# Altium PCB roTDSP.PcbDoc (part 1 of 2)
Units mm, origin at the board's own origin, x right, y up, seen from the top; angles counter-clockwise.
Board outline 100.2 x 100 mm, 2 copper layers (Top Layer, Bottom Layer); 148 components, 98 nets, 431 pads, 651 vias.
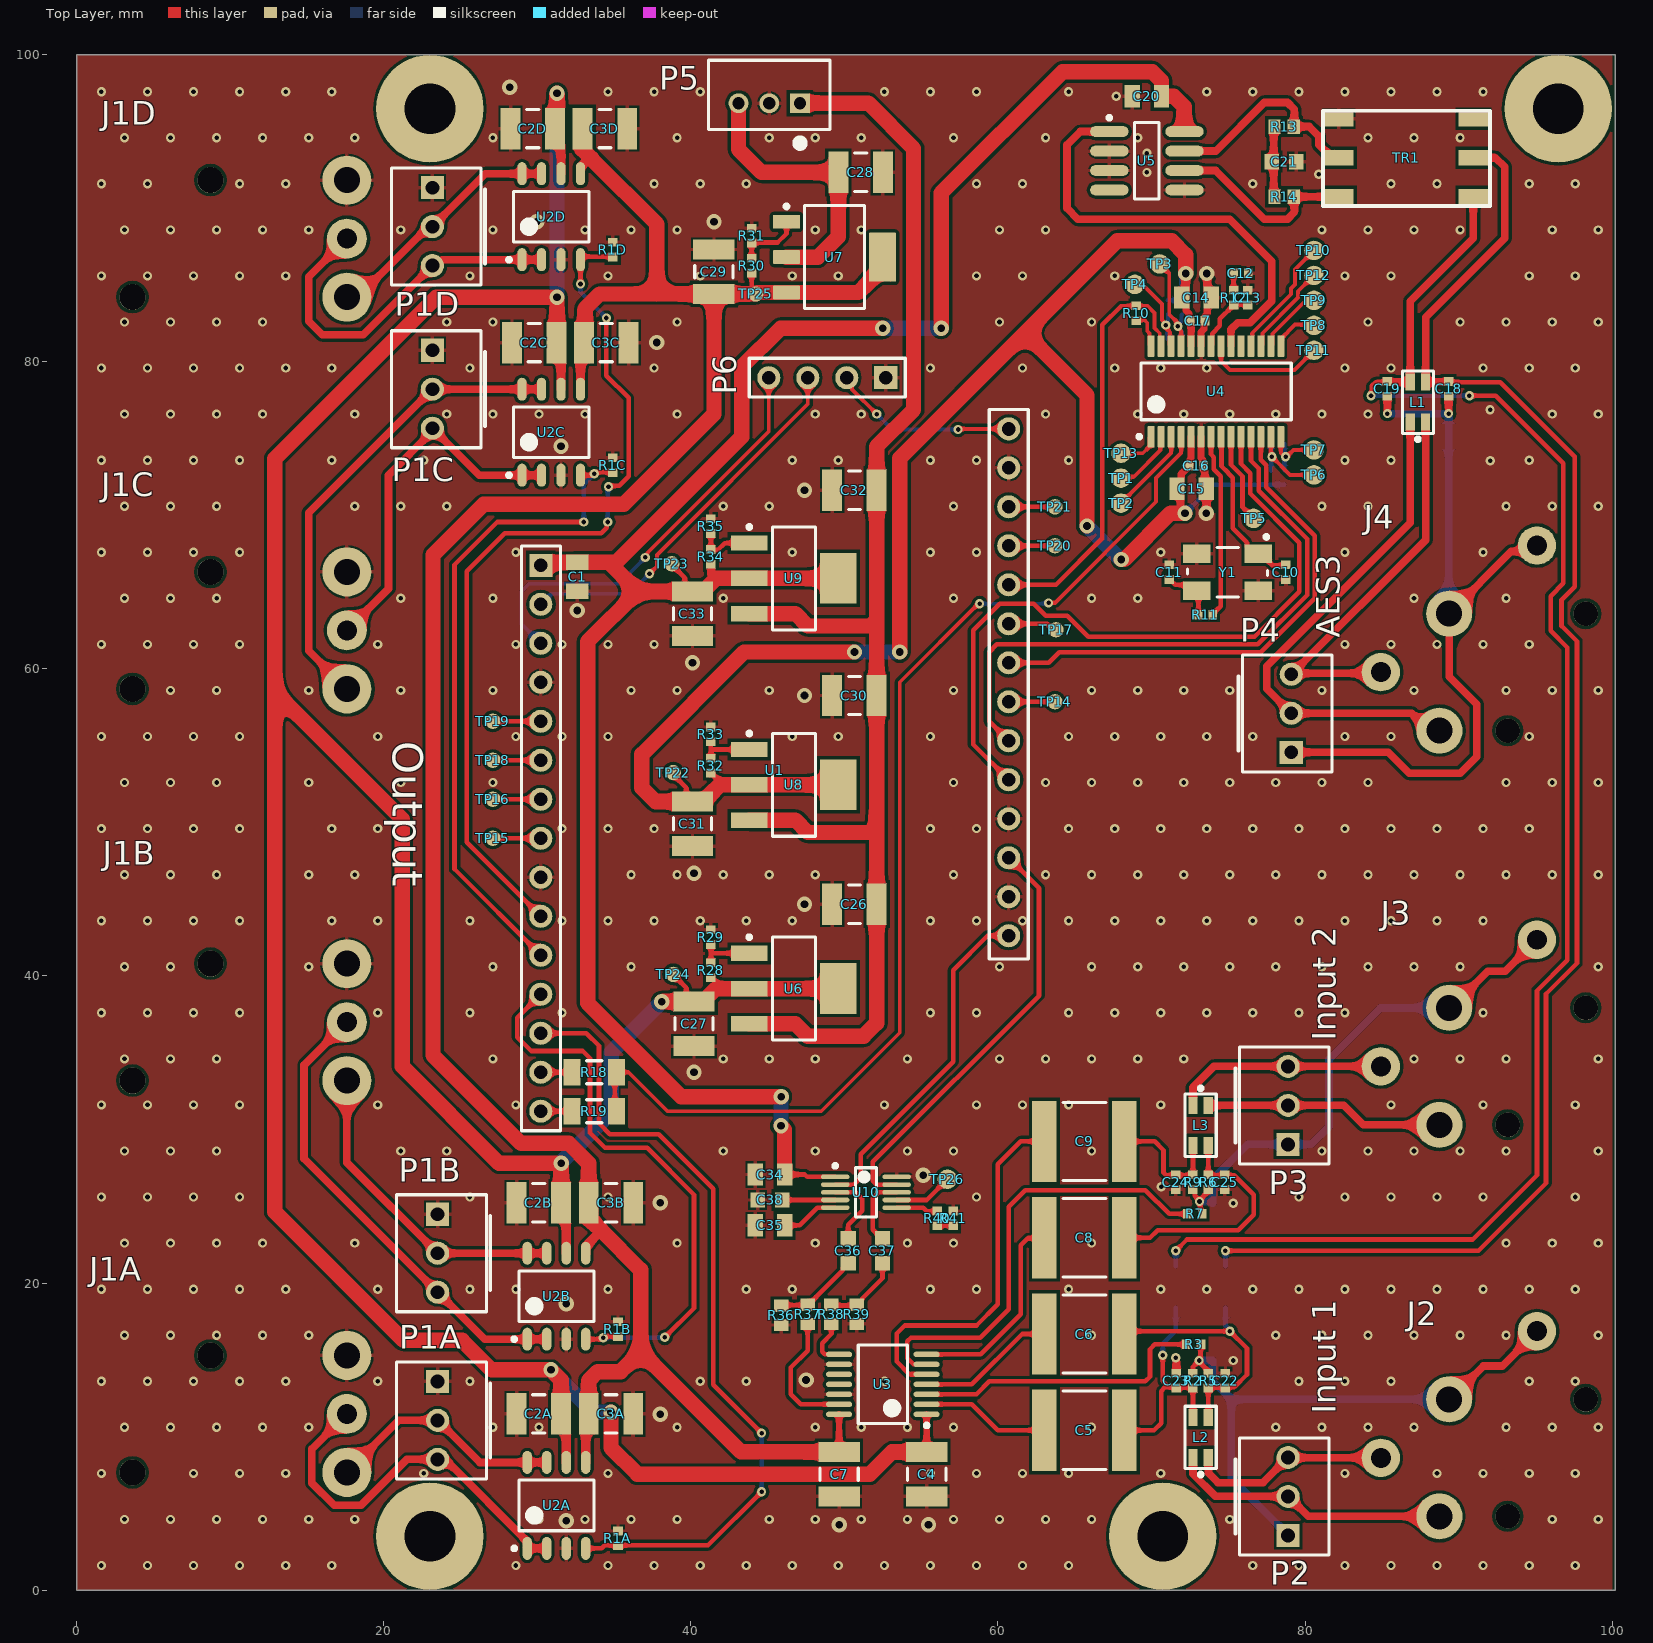
[diagram p0: Top Layer view]
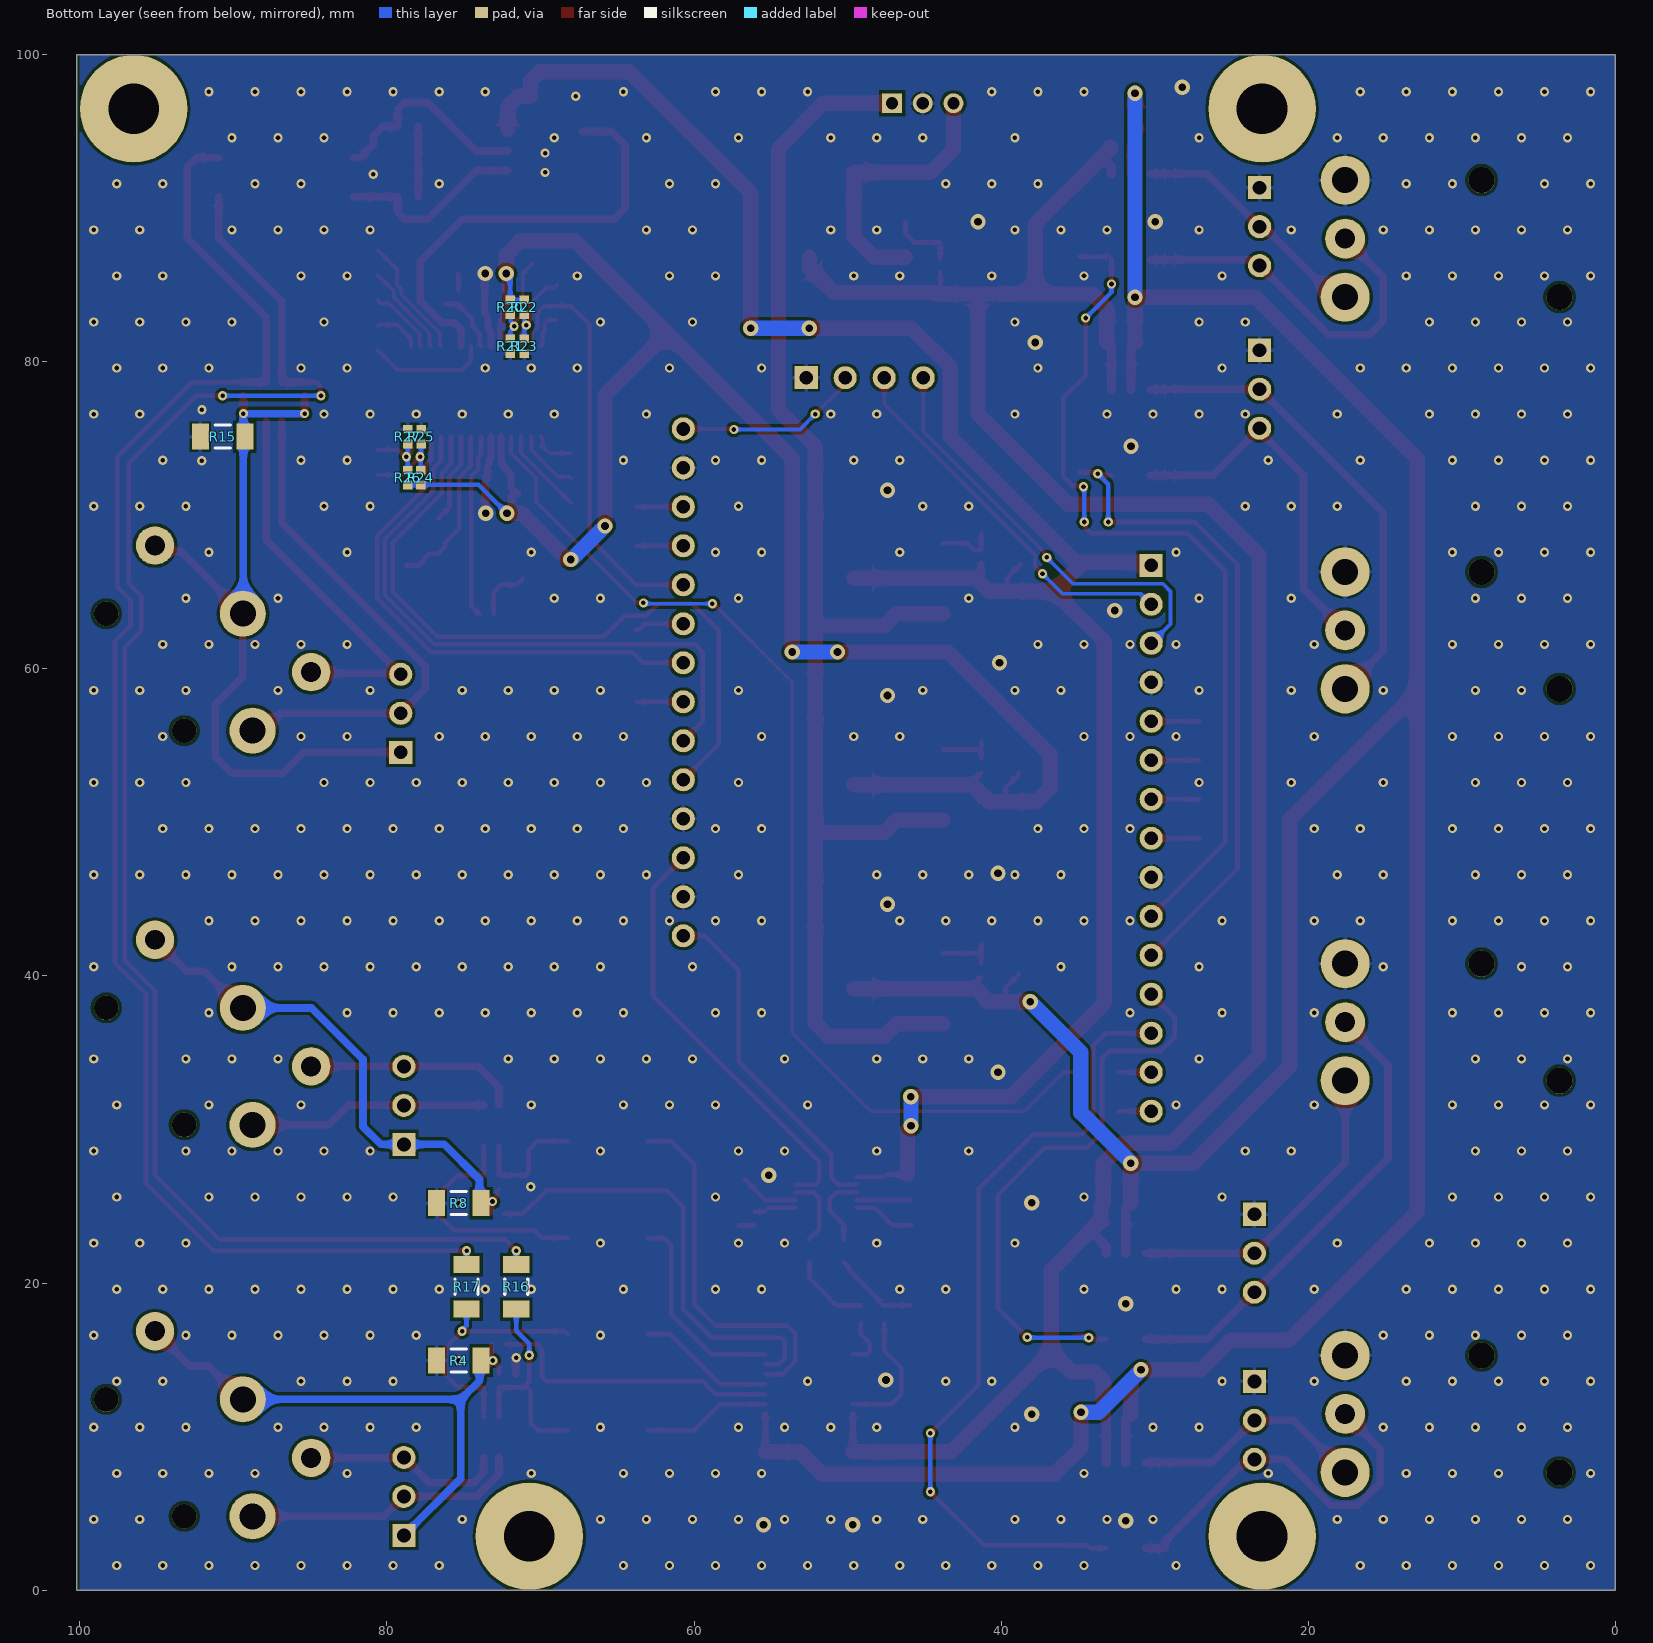
[diagram p1: Bottom Layer view, seen from below]
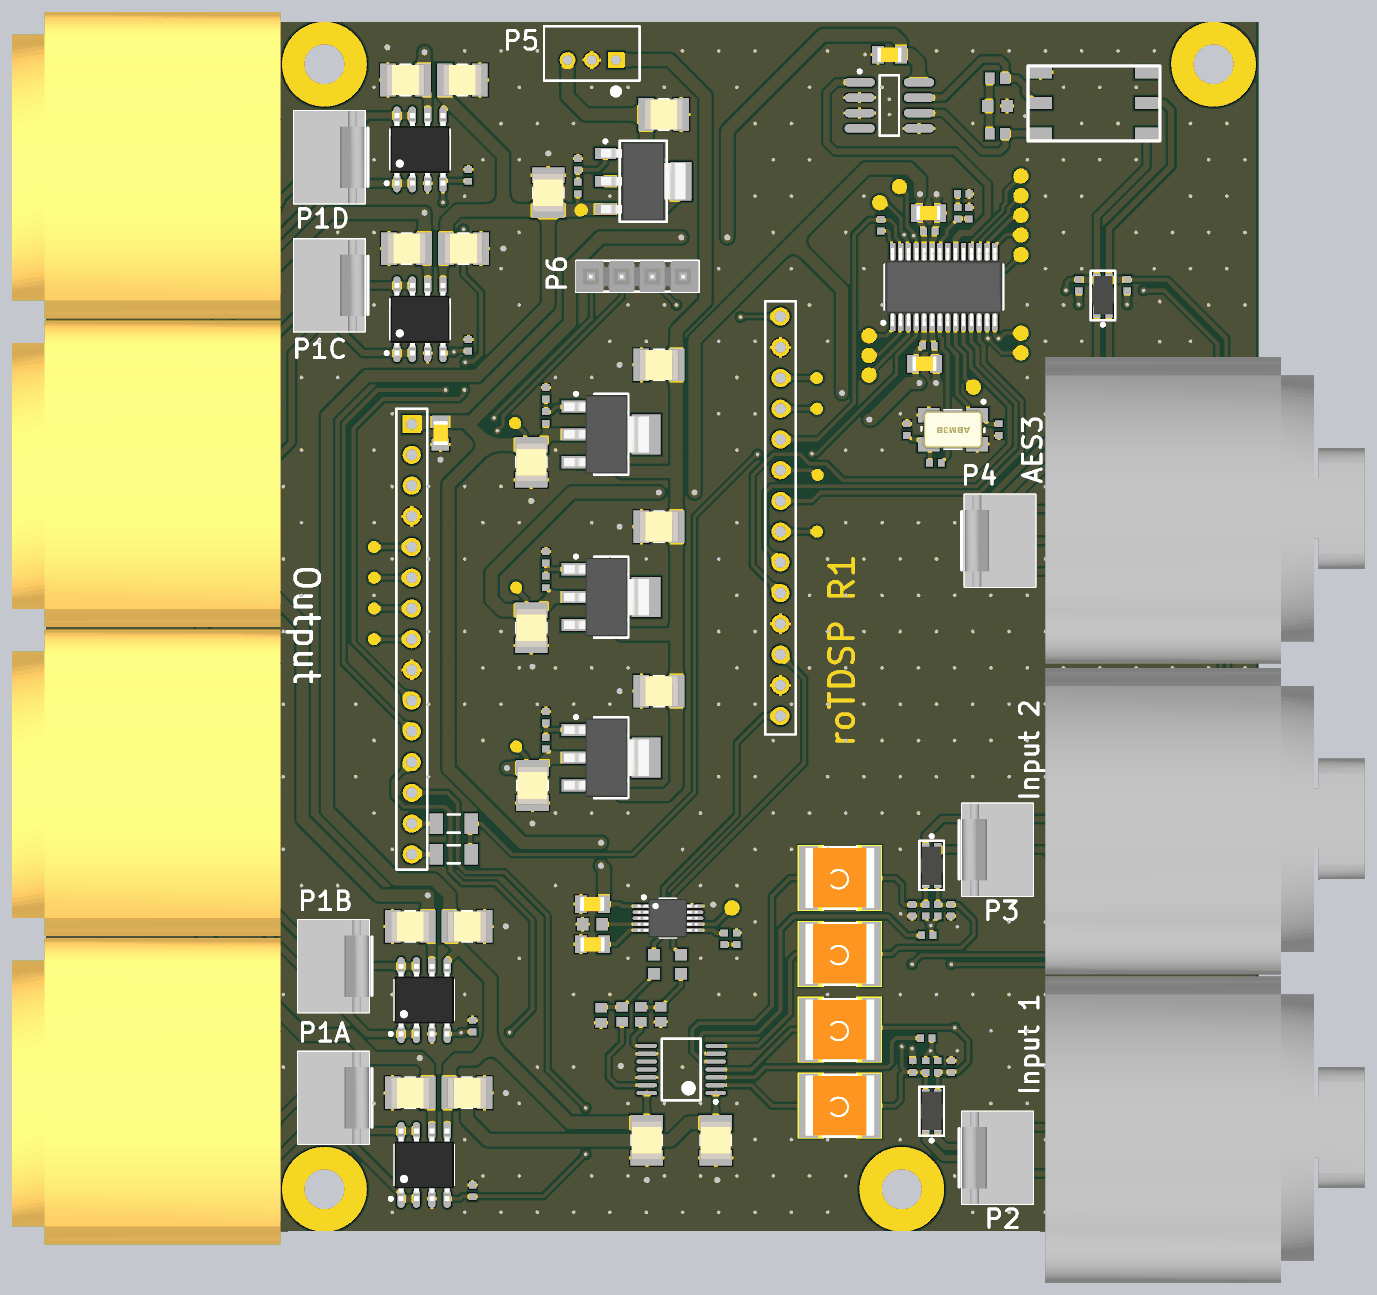
[diagram p3: 3D render of the assembled board from above, using the file's embedded part models]

## Layer stack, top to bottom
Top Solder: solder mask 0.0102, Solder Resist, Dk 3.5
Top Layer: signal copper 0.0356
Dielectric 1: dielectric 0.32, FR-4, Dk 4.8
Bottom Layer: signal copper 0.0356
Bottom Solder: solder mask 0.0102, Solder Resist, Dk 3.5

## Board outline
0,0 100.2,0 100.2,100 0,100

## Design rules (kind name [scope] priority, off if disabled: settings)
Clearance [All] p1: gap=0.2 ignorepadtopadclearanceinfootprint=FALSE
ComponentClearance ComponentClearance_nocollision [InComponentClass('NoColission')] p1: gap=-100 collisioncheckmode=3 verticalgap=2540 showdistances=FALSE
ComponentClearance [All] p2: gap=0.254 collisioncheckmode=3 verticalgap=0.254 showdistances=FALSE
Height [All] p1: minheight=0 maxheight=254 prefheight=12.7
HoleSize [All] p1: absolutevalues=TRUE maxlimit=5 minlimit=0.025 maxpercent=80.000 minpercent=20.000
MinimumSolderMaskSliver [All] p1: minsoldermaskwidth=0
PlaneClearance [All] p1: clearance=0.2
PlaneConnect [All] p1: planeconnectstyle=Direct reliefexpansion=0.127 reliefentries=4 reliefconductorwidth=0.254 reliefairgap=0.127
PolygonConnect NetTieDirect [InComponentClass('NetTieDirect') or InNetClass('NetTieDirect')] p1: connectstyle=Direct reliefconductorwidth=0.254 reliefentries=4 polygonreliefangle="90 Angle" airgapwidth=0.254 // polygon shall connect direct to all componnets in Component Class "NetTieRelief".
PolygonConnect NetTieRelief [InComponentClass('NetTieRelief')] p2: connectstyle=Relief reliefconductorwidth=0.254 reliefentries=4 polygonreliefangle="90 Angle" airgapwidth=0.254 // All pads in this component class "NetTieRelief" shall have this distance to the Polygon
PolygonConnect "PolygonConnect_ BGA" [HasFootprint('BGA289C80P17X17_1400X1400X132') or HasFootprint('96_FPGA_DD3_14mmx10mm-small_size')] p3: thpad.connectstyle=Relief thpad.reliefconductorwidth=0.254 thpad.reliefentries=4 thpad.polygonreliefangle="90 Angle" thpad.airgapwidth=0.127 smdpad.connectstyle=Relief smdpad.reliefconductorwidth=0.127 smdpad.reliefentries=4 smdpad.polygonreliefangle="90 Angle" smdpad.airgapwidth=0.1 via.connectstyle=Direct via.reliefconductorwidth=0.254 via.reliefentries=4 via.polygonreliefangle="90 Angle" via.airgapwidth=0.127
PolygonConnect "PolygonConnect_ General" [All] p4: thpad.connectstyle=Relief thpad.reliefconductorwidth=0.254 thpad.reliefentries=4 thpad.polygonreliefangle="90 Angle" thpad.airgapwidth=0.127 smdpad.connectstyle=Relief smdpad.reliefconductorwidth=0.254 smdpad.reliefentries=4 smdpad.polygonreliefangle="90 Angle" smdpad.airgapwidth=0.127 via.connectstyle=Direct via.reliefconductorwidth=0.254 via.reliefentries=4 via.polygonreliefangle="90 Angle" via.airgapwidth=0.127
RoutingVias [All] p1: holewidth=0.5 width=1 viastyle="Through Hole" minholewidth=0.3 minwidth=0.6 maxholewidth=0.5 maxwidth=1
SilkToSilkClearance [All] p1: silktosilkclearance=0.1
SilkToSolderMaskClearance [IsPad] p1: minsilkscreentomaskgap=0 clearancetoexposedcopper=TRUE
SolderMaskExpansion [All] p1: expansion=0.102 istentingtop=FALSE
UnpouredPolygon [All] p1: allowshelved=TRUE
Width [All] p1: maxlimit=1 minlimit=0.254 preferedwidth=0.3 minimp=50.000000 maximp=50.000000 favimp=50.000000
21 further rules are at their usual default settings.

## Classes and differential pairs
channel class OutputDriver: Output1 Output2 Output3 Output4

## Components (designator, comment, footprint, x,y, rotation, side; value= is the part's Value field where it differs from the comment)
C1 "Cap" CAPC2013X140X50NL20T25 32.593,66 r90 top value=10µF
C2A "Cap" CAPC3225N 30.093,11.473 r0 top value=1µF (schematic designator C2)
C2B "Cap" CAPC3225N 30.093,25.23 r0 top value=1µF (schematic designator C2)
C2C "Cap" CAPC3225N 29.794,81.26 r0 top value=1µF (schematic designator C2)
C2D "Cap" CAPC3225N 29.7,95.2 r0 top value=1µF (schematic designator C2)
C3A "Cap" CAPC3225N 34.793,11.473 r180 top value=1µF (schematic designator C3)
C3B "Cap" CAPC3225N 34.793,25.23 r180 top value=1µF (schematic designator C3)
C3C "Cap" CAPC3225N 34.494,81.26 r180 top value=1µF (schematic designator C3)
C3D "Cap" CAPC3225N 34.4,95.2 r180 top value=1µF (schematic designator C3)
C4 "Cap" CAPC3225N 55.35,7.55 r90 top value=1µF
C5 "Cap" CAPC5750N 65.625,10.405 r180 top value=10µF
C6 "Cap" CAPC5750N 65.625,16.678 r180 top value=10µF
C7 "Cap" CAPC3225N 49.65,7.55 r90 top value=1µF
C8 "Cap" CAPC5750N 65.625,22.95 r180 top value=10µF
C9 "Cap" CAPC5750N 65.625,29.222 r180 top value=10µF
C10 "Cap" CAPC1005X56X25NL10T15 78.757,66.3 r90 top value=18pF
C11 "Cap" CAPC1005X56X25NL10T15 71.157,66.3 r270 top value=18pF
C12 "Cap" CAPC1005X56X25NL10T15 75.818,85.781 r180 top value=68nF
C13 "Cap" CAPC1005X56X25NL10T15 76.268,84.19 r270 top value=4.7nF
C14 "Cap" CAPC2013X140X50NL20T25 72.931,84.19 r180 top value=10µF
C15 "Cap" CAPC2013X140X50NL20T25 72.607,71.74 r180 top value=10µF
C16 "Cap" CAPC1005X56X25NL10T15 72.931,73.24 r0 top value=100nF
C17 "Cap" CAPC1005X56X25NL10T15 73.004,82.69 r0 top value=100nF
C18 "Cap" CAPC1005X56X25NL10T15 89.355,78.24 r90 top value=15pF
C19 "Cap" CAPC1005X56X25NL10T15 85.365,78.24 r90 top value=15pF
C20 "Cap" CAPC2013X140X50NL20T25 69.7,97.3 r0 top value=10µF
C21 "Cap" CAPC1608X90X35NL15T15 78.634,93.048 r180 top value=100nF
C22 "Cap" CAPC1005X56X25NL10T15 74.819,13.64 r270 top value=15pF
C23 "Cap" CAPC1005X56X25NL10T15 71.619,13.64 r270 top value=15pF
C24 "Cap" CAPC1005X56X25NL10T15 71.581,26.57 r90 top value=15pF
C25 "Cap" CAPC1005X56X25NL10T15 74.781,26.57 r90 top value=15pF
C26 "Cap" CAPC3225N 50.65,44.68 r0 top value=1µF
C27 "Cap" CAPC3225N 40.2,36.88 r90 top value=1µF
C28 "Cap" CAPC3225N 51.05,92.345 r0 top value=1µF
C29 "Cap" CAPC3225N 41.5,85.875 r270 top value=1µF
C30 "Cap" CAPC3225N 50.65,58.27 r0 top value=1µF
C31 "Cap" CAPC3225N 40.1,49.91 r90 top value=1µF
C32 "Cap" CAPC3225N 50.65,71.645 r0 top value=1µF
C33 "Cap" CAPC3225N 40.1,63.6 r90 top value=1µF
C34 "Cap" CAPC2013X140X50NL20T25 45.15,27.068 r180 top value=10µF
C35 "Cap" CAPC2013X140X50NL20T25 45.15,23.755 r0 top value=10µF
C36 "Cap" CAPC1608X90X35NL15T15 50.242,22.1 r90 top value=470nF
C37 "Cap" CAPC1608X90X35NL15T15 52.475,22.1 r90 top value=470nF
C38 "Cap" CAPC1608X90X35NL15T15 45.15,25.41 r0 top value=470nF
J1A "NC3MAAH-1" NC3MAAH-1 17.588,11.473 r90 top (schematic designator J1)
J1B "NC3MAAH-1" NC3MAAH-1 17.588,36.991 r90 top (schematic designator J1)
J1C "NC3MAAH-1" NC3MAAH-1 17.588,62.509 r90 top (schematic designator J1)
J1D "NC3MAAH-1" NC3MAAH-1 17.588,88.027 r90 top (schematic designator J1)
J2 "Input 1" NC3FAH2 89.39,12.42 r270 top
J3 "Input 2" NC3FAH2 89.39,37.92 r270 top
J4 "AES3" NC3FAH2 89.39,63.6 r270 top
L1 "Common Mode Choke" WE-CNSW-1206 87.355,77.38 r180 top
L2 "Common Mode Choke" WE-CNSW-1206 73.2,9.94 r180 top
L3 "Common Mode Choke" WE-CNSW-1206 73.2,30.27 r0 top
P1A "Header 3" MTA-100-3P 23.5,13.593 r270 top (schematic designator P1)
P1B "Header 3" MTA-100-3P 23.5,24.48 r270 top (schematic designator P1)
P1C "Header 3" MTA-100-3P 23.157,80.76 r270 top (schematic designator P1)
P1D "Header 3" MTA-100-3P 23.157,91.35 r270 top (schematic designator P1)
P2 "Header 3" MTA-100-3P 78.9,3.56 r90 top
P3 "Header 3" MTA-100-3P 78.9,29.03 r90 top
P4 "Header 3" MTA-100-3P 79.104,54.57 r90 top
P5 "B3B-PH-K-S(LF)(SN)" JST-B3B-PH-K-S-3_V 45.1,97.4 r180 top
P6 "Header 4" TSW-104-14-S-S 52.69,78.97 r180 top
R1A "Res" RESC1005X40X25NL05T05 35.248,3.364 r270 top value=100k (schematic designator R1)
R1B "Res" RESC1005X40X25NL05T05 35.248,16.99 r270 top value=100k (schematic designator R1)
R1C "Res" RESC1005X40X25NL05T05 34.905,73.271 r270 top value=100k (schematic designator R1)
R1D "Res" RESC1005X40X25NL05T05 34.905,87.31 r270 top value=100k (schematic designator R1)
R2 "Res" RESC1005X40X25NL05T05 72.7,13.64 r90 top value=100k
R3 "Res" RESC1005X40X25NL05T05 72.748,16 r180 top value=1M
R4 "Res" RESC3216X60X45NL10T20 75.319,14.95 r180 bottom value=0
R5 "Res" RESC1005X40X25NL05T05 73.7,13.64 r270 top value=100k
R6 "Res" RESC1005X40X25NL05T05 73.7,26.57 r270 top value=100k
R7 "Res" RESC1005X40X25NL05T05 72.823,24.5 r180 top value=1M
R8 "Res" RESC3216X60X45NL10T20 75.319,25.201 r180 bottom value=0
R9 "Res" RESC1005X40X25NL05T05 72.7,26.57 r90 top value=100k
R10 "Res" RESC1005X40X25NL05T05 69,83.185 r90 top value=0
R11 "Res" RESC1005X40X25NL05T05 73.507,63.541 r0 top value=510
R12 "Res" RESC1005X40X25NL05T05 75.368,84.19 r270 top value=680
R13 "Res" RESC1609X50X30NL10T20 78.632,95.33 r0 top value=56
R14 "Res" RESC1609X50X30NL10T20 78.632,90.76 r0 top value=56
R15 "Res" RESC3216X60X45NL10T20 90.705,75.13 r180 bottom value=0
R16 "Res" RESC3216X60X45NL10T20 71.581,19.75 r90 bottom value=0
R17 "Res" RESC3216X60X45NL10T20 74.819,19.75 r90 bottom value=0
R18 "Res" RESC3216X60X45NL10T20 33.693,33.73 r0 top value=0
R19 "Res" RESC3216X60X45NL10T20 33.693,31.19 r0 top value=0
R20 "Res" RESC1005X40X25NL05T05 71.974,83.548 r270 bottom value=0
R21 "Res" RESC1005X40X25NL05T05 71.959,81.021 r270 bottom value=0
R22 "Res" RESC1005X40X25NL05T05 71.068,83.565 r270 bottom value=0
R23 "Res" RESC1005X40X25NL05T05 71.054,81.03 r270 bottom value=0
R24 "Res" RESC1005X40X25NL05T05 77.802,72.456 r90 bottom value=0
R25 "Res" RESC1005X40X25NL05T05 77.779,75.13 r90 bottom value=0
R26 "Res" RESC1005X40X25NL05T05 78.654,72.465 r90 bottom value=0
R27 "Res" RESC1005X40X25NL05T05 78.654,75.13 r90 bottom value=0
R28 "Res" RESC1005X40X25NL05T05 41.3,40.379 r270 top value=150
R29 "Res" RESC1005X40X25NL05T05 41.3,42.53 r270 top value=2k
R30 "Res" RESC1005X40X25NL05T05 43.95,86.275 r270 top value=150
R31 "Res" RESC1005X40X25NL05T05 43.95,88.225 r270 top value=2k
R32 "Res" RESC1005X40X25NL05T05 41.3,53.7 r270 top value=240
R33 "Res" RESC1005X40X25NL05T05 41.3,55.74 r90 top value=390
R34 "Res" RESC1005X40X25NL05T05 41.3,67.3 r270 top value=240
R35 "Res" RESC1005X40X25NL05T05 41.3,69.3 r90 top value=750
R36 "Res" RESC1609X50X30NL10T20 45.875,17.89 r270 top value=91
R37 "Res" RESC1609X50X30NL10T20 47.6,17.96 r90 top value=910
R38 "Res" RESC1609X50X30NL10T20 49.15,17.96 r90 top value=910
R39 "Res" RESC1609X50X30NL10T20 50.8,17.96 r90 top value=91
R40 "Res" RESC1005X40X25NL05T05 56.05,24.205 r90 top value=33k
R41 "Res" RESC1005X40X25NL05T05 57.075,24.205 r270 top value=1.8k
TP1 "TP Ø1.27MM" TP_1.27MM 68.014,72.423 r90 top
TP2 "TP Ø1.27MM" TP_1.27MM 68.014,70.798 r90 top
TP3 "TP Ø1.27MM" TP_1.27MM 70.536,86.381 r90 top
TP4 "TP Ø1.27MM" TP_1.27MM 68.91,85.05 r90 top
TP5 "TP Ø1.27MM" TP_1.27MM 76.654,69.81 r90 top
TP6 "TP Ø1.27MM" TP_1.27MM 80.584,72.64 r90 top
TP7 "TP Ø1.27MM" TP_1.27MM 80.584,74.266 r90 top
TP8 "TP Ø1.27MM" TP_1.27MM 80.584,82.381 r90 top
TP9 "TP Ø1.27MM" TP_1.27MM 80.584,84.007 r90 top
TP10 "TP Ø1.27MM" TP_1.27MM 80.584,87.259 r90 top
TP11 "TP Ø1.27MM" TP_1.27MM 80.584,80.755 r90 top
TP12 "TP Ø1.27MM" TP_1.27MM 80.584,85.633 r90 top
TP13 "TP Ø1.27MM" TP_1.27MM 68.014,74.049 r90 top
TP14 "TP Ø1.0MM" TP_1MM 63.714,57.86 r90 top
TP15 "TP Ø1.0MM" TP_1MM 27.1,48.97 r90 top
TP16 "TP Ø1.0MM" TP_1MM 27.1,51.51 r90 top
TP17 "TP Ø1.0MM" TP_1MM 63.78,62.55 r90 top
TP18 "TP Ø1.0MM" TP_1MM 27.1,54.05 r90 top
TP19 "TP Ø1.0MM" TP_1MM 27.1,56.59 r90 top
TP20 "TP Ø1.0MM" TP_1MM 63.714,68.02 r90 top
TP21 "TP Ø1.0MM" TP_1MM 63.714,70.56 r90 top
TP22 "TP Ø1.0MM" TP_1MM 38.85,53.25 r90 top
TP23 "TP Ø1.0MM" TP_1MM 38.75,66.85 r90 top
TP24 "TP Ø1.0MM" TP_1MM 38.85,40.104 r90 top
TP25 "TP Ø1.0MM" TP_1MM 44.225,84.425 r90 top
TP26 "TP Ø1.27MM" TP_1.27MM 56.7,26.76 r90 top
TR1 "TG10-DA1NSLF" TG10-DA1NSLF-Footprint-1 90.96,90.76 r90 top
U1 "ADAU1401-DSPmini" ADAU1401-DSPmini 30.22,66.75 r0 top locked
U2A "DRV135UA" SOIC127P600X360-8N 31.243,5.514 r90 top (schematic designator U2)
U2B "DRV135UA" SOIC127P600X360-8N 31.243,19.14 r90 top (schematic designator U2)
U2C "DRV135UA" SOIC127P600X360-8N 30.9,75.42 r90 top (schematic designator U2)
U2D "DRV135UA" SOIC127P600X360-8N 30.9,89.46 r90 top (schematic designator U2)
U3 "INA1652IPW" SOP65P640X120-14N 52.5,13.4 r180 top
U4 "DIR9001PW" PW0028A_N 74.204,78.08 r90 top
U5 "ADM1485ARZ" ADI-R-8_M 69.7,93.1 r0 top
U6 "LM317EMP" SOT223-4N 46.7,39.18 r0 top
U7 "LM337IMPX" DCY0004A_N 49.35,86.825 r0 top
U8 "LM317EMP" SOT223-4N 46.7,52.45 r0 top
U9 "LM317EMP" SOT223-4N 46.7,65.9 r0 top
U10 "NJM2762RB2" SOP50P490X110-10N 51.4,25.91 r0 top
Y1 "Crystal4" XTAL-5x3.2MM 74.957,66.3 r180 top

## Footprints (in the part's own frame and the unit in brackets; to place one, negate y for a bottom-side part, rotate by r counter-clockwise, add the part's x,y. Pads: shape width x height; smd on the part's side, far side on the other; paste and mask are expansions set on the pad)
ADAU1401-DSPmini [mm]
  rect 1.5x1.5 hole 0.9: 1(0,0)
  round 1.5 hole 0.9: 2(0,-2.54) 3(0,-5.08) 4(0,-7.62) 5(0,-10.16) 6(0,-12.7) 7(0,-15.24) 8(0,-17.78) 9(0,-20.32) 10(0,-22.86) 11(0,-25.4) 12(0,-27.94) 13(0,-30.48) 14(0,-33.02) 15(0,-35.56) 16(30.48,-24.13) 17(30.48,-21.59) 18(30.48,-19.05) 19(30.48,-16.51) 20(30.48,-13.97) 21(30.48,-11.43) 22(30.48,-8.89) 23(30.48,-6.35) 24(30.48,-3.81) 25(30.48,-1.27) 26(30.48,1.27) 27(30.48,3.81) 28(30.48,6.35) 29(30.48,8.89)
  silkscreen extent -1.27,-36.83 31.75,10.16
ADI-R-8_M [mm] "SOIC, 8-Leads, Body 5x4mm, Pitch 1.27mm, IPC Low Density"
  oval 2.5x0.7 smd: 1(-2.45,1.905) 2(-2.45,0.635) 3(-2.45,-0.635) 4(-2.45,-1.905) 5(2.45,-1.905) 6(2.45,-0.635) 7(2.45,0.635) 8(2.45,1.905)
  silkscreen extent -2.57,-2.5 0.8,2.93, body extent -2,-2.5 2,2.5, height 1.75
CAPC1005X56X25NL10T15 [mm] "Chip Capacitor, 2-Leads, Body 1.00x0.50mm, IPC Medium Density"
  rect 0.57x0.62 smd: 1(-0.48,0) 2(0.48,0)
  body extent -0.55,-0.3 0.55,0.3, height 0.56
CAPC1608X90X35NL15T15 [mm] "Chip Capacitor, 2-Leads, Body 1.60x0.81mm, IPC Medium Density"
  rect 0.95x1 smd: 1(-0.8,0) 2(0.8,0)
  body extent -0.88,-0.48 0.87,0.48, height 0.9
CAPC2013X140X50NL20T25 [mm] "Chip Capacitor, 2-Leads, Body 2.00x1.25mm, IPC Medium Density"
  rect 1x1.45 smd: 1(-0.95,0) 2(0.95,0)
  body extent -0.99,-0.61 1.01,0.59, height 1
CAPC3225N [mm] "Chip Capacitor, Body 3.2x2.5mm, IPC Medium Density"
  rect 1.3x2.7 smd: 1(-1.45,0) 2(1.45,0)
  silkscreen extent -0.4,-1.25 0.4,1.25, body extent -1.6,-1.26 1.6,1.26, height 2.52
CAPC5750N [mm] "Chip Capacitor, Body 5.7x5.0mm, IPC Medium Density"
  rect 1.6x5.3 smd: 1(-2.6,0) 2(2.6,0)
  silkscreen extent -1.4,-2.55 1.4,2.55, body extent -3.48,-2.74 3.51,2.72, height 2.26
DCY0004A_N [mm] "SOT223, 4-Leads, Body 6.7x3.7mm, Pitch 2.3mm, IPC Medium Density"
  rrect11% 1.75x0.9 smd: 1(-3.125,2.3) 2(-3.125,0) 3(-3.125,-2.3)
  rrect6% 1.75x3.2 smd: 4(3.125,0)
  silkscreen extent -3.25,-3.35 1.95,3.42, body extent -3.5,-3.25 3.5,3.25, height 1.62
JST-B3B-PH-K-S-3_V [mm] "Connector, 3-Leads, Body 7.9x4.5mm, Pitch 2mm"
  rect 1.3x1.3 hole 0.8: 1(-2,0.55)
  round 1.3 hole 0.8: 2(0,0.55) 3(2,0.55)
  silkscreen extent -3.95,-2.25 3.95,3.4, body extent -3.95,-2.25 3.95,2.25, height 6
MTA-100-3P [mm]
  rect 1.5x1.5 hole 0.9: 1(0,0)
  round 1.5 hole 0.9: 2(2.54,0) 3(5.08,0)
  silkscreen extent -1.27,-2.67 6.35,3.43, body extent -1.27,-2.67 6.35,3.18, height 10.03
NC3FAH2 [mm] "XLR"
  round 3 hole 1.7: 1(0,0) 2(7.62,-0.635)
  round 2.5 hole 1.3: 3(3.81,-4.45) G(-4.44,5.72)
  round 1.6 hole 1.6: 4(0,8.89) 4(7.62,3.81)
  body extent -8.69,-6.8 16.66,19.6, height 29.65
NC3MAAH-1 [mm]
  round 1.7 hole 1.7: 0(-3.81,13.97) 0(3.81,8.89)
  round 3.2 hole 1.7: 1(3.81,0) 2(-3.81,0)
  round 2.6 hole 1.3: 3(0,0)
  body extent -12.55,-1.78 12.8,20.42, height 25.35
PW0028A_N [mm] "SOP, 28-Leads, Body 9.8x4.5mm, Pitch 0.65mm, IPC Medium Density"
  rrect22% 1.4x0.45 smd: 1(-2.95,4.225) 2(-2.95,3.575) 3(-2.95,2.925) 4(-2.95,2.275) 5(-2.95,1.625) 6(-2.95,0.975) 7(-2.95,0.325) 8(-2.95,-0.325) 9(-2.95,-0.975) 10(-2.95,-1.625) 11(-2.95,-2.275) 12(-2.95,-2.925) 13(-2.95,-3.575) 14(-2.95,-4.225) 15(2.95,-4.225) 16(2.95,-3.575) 17(2.95,-2.925) 18(2.95,-2.275) 19(2.95,-1.625) 20(2.95,-0.975) 21(2.95,-0.325) 22(2.95,0.325) 23(2.95,0.975) 24(2.95,1.625) 25(2.95,2.275) 26(2.95,2.925) 27(2.95,3.575) 28(2.95,4.225)
  silkscreen extent -3.07,-4.9 1.85,5.12, body extent -3.21,-4.85 3.21,4.85, height 1
RESC1005X40X25NL05T05 [mm] "Chip Resistor, 2-Leads, Body 1.00x0.50mm, IPC Medium Density"
  rect 0.57x0.62 smd: 1(-0.48,0) 2(0.48,0)
  body extent -0.53,-0.27 0.53,0.28, height 0.4
RESC1609X50X30NL10T20 [mm] "Chip Resistor, 2-Leads, Body 1.55x0.85mm, IPC Medium Density"
  rect 0.8x0.95 smd: 1(-0.625,0) 2(0.625,0)
  body extent -0.82,-0.48 0.82,0.48, height 0.5
RESC3216X60X45NL10T20 [mm] "Chip Resistor, 2-Leads, Body 3.20x1.60mm, IPC Medium Density"
  rect 1.1x1.7 smd: 1(-1.45,0) 2(1.45,0)
  silkscreen extent -0.5,-0.75 0.5,0.75, body extent -1.65,-0.85 1.65,0.85, height 0.6
SOIC127P600X360-8N [mm] "SOIC, 8-Leads, Body 4,9x3,9mm (max), Pitch 1,27mm, IPC Medium Density"
  oval 1.5x0.6 smd: 1(-2.8,1.905) 2(-2.8,0.635) 3(-2.8,-0.635) 4(-2.8,-1.905) 5(2.8,-1.905) 6(2.8,-0.635) 7(2.8,0.635) 8(2.8,1.905)
  silkscreen extent -2.92,-2.45 1.65,2.88, body extent -3,-2.45 3,2.45, height 1.71
SOP50P490X110-10N [mm] "MSOP, 10-Leads, Body 3.2x3.2mm (max), Pitch 0.5mm, IPC Medium Density. MO-187BA"
  oval 1.85x0.3 smd: 1(-2,1) 2(-2,0.5) 3(-2,0) 4(-2,-0.5) 5(-2,-1) 6(2,-1) 7(2,-0.5) 8(2,0) 9(2,0.5) 10(2,1)
  silkscreen extent -2.12,-1.6 0.67,1.85, body extent -2.5,-1.6 2.46,1.6, height 1.25
SOP65P640X120-14N [mm] "TSSOP, 14-Leads, Body 5.1x4.5mm (max), Pitch 0.65mm, IPC Medium Density. MO-153AB-1"
  oval 1.7x0.35 smd: 1(-2.85,1.95) 2(-2.85,1.3) 3(-2.85,0.65) 4(-2.85,0) 5(-2.85,-0.65) 6(-2.85,-1.3) 7(-2.85,-1.95) 8(2.85,-1.95) 9(2.85,-1.3) 10(2.85,-0.65) 11(2.85,0) 12(2.85,0.65) 13(2.85,1.3) 14(2.85,1.95)
  silkscreen extent -2.98,-2.55 1.6,2.8, body extent -2.25,-2.55 2.25,2.55, height 1.2
SOT223-4N [mm] "SOT223/SC73, 4-Leads, Body 6.5x3.5mm, Pitch 2.3mm, Lead Span 7mm, IPC Medium Density"
  rect 2.4x1 smd: 1(-2.9,2.3) 2(-2.9,0) 3(-2.9,-2.3)
  rect 2.4x3.3 smd: 4(2.9,0)
  silkscreen extent -3.02,-3.35 1.4,3.47, body extent -3.88,-3.25 3.12,3.25, height 1.64
TG10-DA1NSLF-Footprint-1 [mm]
  rect 1.02x1.91 smd: 1(0,0) 2(2.54,0) 3(5.08,0) 4(5.08,8.76) 5(2.54,8.76) 6(0,8.76)
  silkscreen extent -0.6,-1.1 5.6,9.8
TP_1.27MM [mm] "1.27mm diameter copper pad test point"
  round 1.27 smd paste-1 mask+0.051: 1(0,0)
TP_1MM [mm] "1mm diameter copper pad test point"
  round 1 smd paste-1 mask+0.051: 1(0,0)
TSW-104-14-S-S [mm]
  rect 1.5x1.5 hole 0.9: 1(0,0)
  round 1.5 hole 0.9: 2(2.54,0) 3(5.08,0) 4(7.62,0)
  silkscreen extent -1.27,-1.27 8.89,1.27, body extent -1.23,-1.25 8.93,1.29, height 10.67
WE-CNSW-1206 [mm] "WE-CNSW, 4-Leads, Body 3,2x1,8mm (max), Pitch 2,60mm"
  rect 0.6x1.1 smd: 1(-0.5,1.3) 2(0.5,1.3) 3(0.5,-1.3) 4(-0.5,-1.3)
  silkscreen extent -1.02,-2.03 1.02,2.54, body extent -0.81,-1.64 0.81,1.57, height 1.99
XTAL-5x3.2MM [mm] "Crystal 4 pins 5x3.2x1.1mm"
  rect 1.8x1.2 smd: 1(-2,-1.2) 2(2,-1.2) 3(2,1.2) 4(-2,1.2)
  silkscreen extent -2.65,-2.42 2.6,1.6, body extent -2.49,-1.6 2.51,1.6, height 1.1

## Part data
C1 C14 C15 C20 C34 C35: library part CMP-CAP-00199-6, "CR0805 10u 10V X7R 10% h=1.25mm", Capacitor Type=Ceramic, Case/Package=0805, Dielectric=X7R, Tolerance=10%, Voltage=10V, Zenitel PartNumber=4000060821, Mount=SMD, Pins=2, RoHS=Yes
C2A C2B C2C C2D C3A C3B C3C C3D C4 C7 C26 C27 C28 C29 C30 C31 C32 C33: library part CMP-CAP-00478-3, "Chip cap 1uF 50v X7R 1210", Capacitor Type=Ceramic, Case/Package=1210, Dielectric=X7R, Tolerance=10%, Voltage=50V, Zenitel PartNumber=4000084277, Mount=SMD
C5 C6 C8 C9: library part CMP-CAP-00538-3, "10UF, 100V, X7S, 2220", Capacitor Type=Ceramic, Case/Package=2220, Dielectric=X7S, Tolerance=100%, Voltage=100V, Zenitel PartNumber=4000087361, Mount=SMD
C10 C11: library part CMP-CAP-00019-6, "Chip cap 18p 50V - 0402", Capacitor Type=Ceramic, Case/Package=0402, Dielectric=NP0, Tolerance=5%, Voltage=50V, Zenitel PartNumber=4000080916, Mount=SMD, Pins=2, RoHS=Yes
C12: library part CMP-CAP-00050-6, "Chip cap 68n 10V - 0402", Capacitor Type=Ceramic, Case/Package=0402, Dielectric=X5R, Tolerance=100%, Voltage=10V, Zenitel PartNumber=4000080947, Mount=SMD, Pins=2, RoHS=Yes
C13: library part CMP-CAP-00043-6, "Chip cap 4700p 50V - 0402", Capacitor Type=Ceramic, Case/Package=0402, Dielectric=-, Tolerance=100%, Voltage=50V, Zenitel PartNumber=4000080940, Mount=SMD, Pins=2, RoHS=Yes
C16 C17: library part CMP-CAP-00051-6, "Chip cap  100n 10V - 0402  X7R", Capacitor Type=Ceramic, Case/Package=0402, Dielectric=X7R, Tolerance=10%, Voltage=10V, Zenitel PartNumber=4000080948, Mount=SMD, Pins=2, RoHS=Yes
C18 C19 C22 C23 C24 C25: library part CMP-CAP-00859-5, "Chip cap 15pF 50V NP0 - 0402", Capacitor Type=Ceramic, Case/Package=0402, Dielectric=NP0, Tolerance=1%, Voltage=50V, Zenitel PartNumber=EFSMD17120, Mount=SMT, Pins=2, RoHS=Yes
C21: library part CMP-CAP-00096-6, "Chip cap  100n 50V X7R - 0603", Capacitor Type=Ceramic, Case/Package=0603, Dielectric=X7R, Tolerance=10%, Voltage=50V, Zenitel PartNumber=4000084734, Mount=SMD, Pins=2, RoHS=Yes
C36 C37 C38: library part CMP-CAP-00900-5, "Chip cap 470nF 16V X7R - 0603", Capacitor Type=Ceramic, Case/Package=0603, Dielectric=X7R, Tolerance=10%, Voltage=16V, Zenitel PartNumber=EFSMD16664, Mount=SMT, Pins=2, RoHS=Yes
J1A J1B J1C J1D: library part CMP-CON-00332-1, "NC3MAAH-1 3pole male XLR 90deg", Zenitel PartNumber=4000083185, Mount=HOLE
J2 J3 J4: library part CMP-CON-00344-1, "NC3FAH2 3pole female XLR 90deg", Zenitel PartNumber=4000083398, Mount=HOLE
L1 L2 L3: library part CMP-IND-00356-1, "WE-CNSW SMD Common Mode Line Filter", Current=230mA, Zenitel PartNumber=4000086128, Mount=SMD, Type=Coil
P1A P1B P1C P1D P2 P3 P4: library part CMP-CON-00453-1, "MTA-100-3P 3-pin header", Zenitel PartNumber=4000085467, Angle=Straight, Pins=3, Pitch=2.54mm, Rows=1, Series=MTA, Type="MTA header"
P5: library part CMP-2000-05164-1, "Male Header, Pitch 2 mm, 1 x 3 Position, Height 6 mm, Tail Length 3.4 mm, -25 to 85 degC, RoHS, Bulk", Manufacturer=JST, Datasheet URL=https://datasheet.ciiva.com/11746/0900766b80826550-11746939.pdf, Datasheet Version=Oct-06, Manufacturer URL=http://www.jst.com/home2.html, No of Positions=3, Pitch=2mm, Style/Orientation=StraightHeader/Plug, Termination=Crimp, Type=ShroudedHeader
P6: library part CMP-CON-00726-1, "4 Pin straight header", Zenitel PartNumber=4000097756, Angle=Straight, Mount=HOLE, Pins=4, Pitch=2.54mm, Rows=1, Series=TSW-series, Type=Header
R1A R1B R1C R1D R2 R5 R6 R9: library part CMP-RES-00067-4, "Chip resistor 100K - 0402", Case/Package=0402, Power=62.5mW, Tolerance=1%, Voltage=50V, Zenitel PartNumber=4000081112, Mount=SMD, Pins=2, RoHS=Yes
R3 R7: library part CMP-RES-00079-4, "Chip resistor 1M 1% - 0402", Case/Package=0402, Power=62.5mW, Tolerance=1%, Voltage=50V, Zenitel PartNumber=4000081124, Mount=SMD, Pins=2, RoHS=Yes
R4 R8 R15 R16 R17 R18 R19: library part CMP-RES-00440-3, "0R 1206", Case/Package=1206, Power=250mW, Tolerance=0%, Zenitel PartNumber=4000085059, Mount=SMD
R10 R20 R21 R22 R23 R24 R25 R26 R27: library part CMP-RES-00006-4, "Chip resistor 0R - 0402", Case/Package=0402, Power=62.5mW, Tolerance=1%, Voltage=50V, Zenitel PartNumber=4000081051, Mount=SMD, Pins=2, RoHS=Yes
R11: library part CMP-RES-00087-4, "Chip resistor 0402 - 510R 1%", Case/Package=0402, Power=62.5mW, Tolerance=1%, Voltage=50V, Zenitel PartNumber=4000088250, Mount=SMD, Pins=2, RoHS=Yes
R12: library part CMP-RES-00041-4, "Chip resistor 680R - 0402", Case/Package=0402, Power=62.5mW, Tolerance=1%, Voltage=50V, Zenitel PartNumber=4000081086, Mount=SMD, Pins=2, RoHS=Yes
R13 R14: library part CMP-RES-00152-3, "CR 0603 56R 5%", Case/Package=0603, Power=100mW, Tolerance=5%, Zenitel PartNumber=4000098393, Mount=SMD
R28 R30: library part CMP-RES-00033-4, "Chip resistor 150R - 0402", Case/Package=0402, Power=62.5mW, Tolerance=1%, Voltage=50V, Zenitel PartNumber=4000081078, Mount=SMD, Pins=2, RoHS=Yes
R29 R31: library part CMP-RES-00834-5, "Chip resistor 2k 1% - 0402", Case/Package=0402, Power=63mW, Tolerance=1%, Voltage=50V, Zenitel PartNumber=EGSMD80417, Mount=SMT, Pins=2, RoHS=Yes
R32 R34: library part CMP-RES-01185-4, "Chip resistor 240R 1% - 0402", Case/Package=0402, Power=63mW, Tolerance=1%, Voltage=50V, Zenitel PartNumber=EGSMD80322, Mount=SMT, Pins=2, RoHS=Yes
R33: library part CMP-RES-00038-4, "Chip resistor 390R - 0402", Case/Package=0402, Power=62.5mW, Tolerance=5%, Voltage=50V, Zenitel PartNumber=4000081083, Mount=SMD, Pins=2, RoHS=Yes
R35: library part CMP-RES-01205-4, "Chip resistor 750R 1% - 0402", Case/Package=0402, Power=63mW, Tolerance=1%, Voltage=50V, Zenitel PartNumber=EGSMD80353, Mount=SMT, Pins=2, RoHS=Yes
R36 R39: library part CMP-RES-00157-3, "CR 0603 91R 1%", Case/Package=0603, Power=100mW, Tolerance=1%, Zenitel PartNumber=4000098398, Mount=SMD
R37 R38: library part CMP-RES-00181-3, "CR 0603 910R 1%", Case/Package=0603, Power=100mW, Tolerance=1%, Zenitel PartNumber=4000098422, Mount=SMD
R40: library part CMP-RES-00061-4, "Chip resistor 33K - 0402", Case/Package=0402, Power=62.5mW, Tolerance=1%, Voltage=50V, Zenitel PartNumber=4000081106, Mount=SMD, Pins=2, RoHS=Yes
R41: library part CMP-RES-00046-4, "Chip resistor 1K8 - 0402", Case/Package=0402, Power=62.5mW, Tolerance=1%, Voltage=50V, Zenitel PartNumber=4000081091, Mount=SMD, Pins=2, RoHS=Yes
TP1 TP2 TP3 TP4 TP5 TP6 TP7 TP8 TP9 TP10 TP11 TP12 TP13 TP26: library part CMP-ELMEC-00017-2, "Test Point, copper pad, 1.27mm diameter", Case/Package=Ø1.27mm, Mount=SMD, RoHS=Yes, Type=TP
TP14 TP15 TP16 TP17 TP18 TP19 TP20 TP21 TP22 TP23 TP24 TP25: library part CMP-ELMEC-00015-2, "Test Point, copper pad, 1.0mm diameter", Case/Package=Ø1mm, Mount=SMD, RoHS=Yes, Type=TP
TR1: library part CMP-TR-00015-1, "Audio Transformers / Signal Transformers ISO MOD GullWng Sgl Audio w/ shield 6pin", Mount=SMD, Pins=6, Ratio=1:1, RoHS=Yes, Type="Digital audio"
U2A U2B U2C U2D: library part CMP-IC-00071-3, "Audio Amplifiers AUDIO LINE DRIVERS", Case/Package=SOIC, Input Offset Voltage (Vos)=10mV, Input Resistance=10kR, Max Dual Supply Voltage=18V, Max Operating Temperature=125°C, Min Dual Supply Voltage=4.5V, Min Operating Temperature=-55°C, Nominal Supply Current=5.2mA, Package Quantity=75, Power Supply Rejection Ratio (PSRR)=80dB, Voltage Gain=6dB, Common Mode Rejection Ratio=46dB, Contact Plating=Gold, Differential Output=Yes, Gain=6dB, HEIGHT=1.58mm, Interface=Analog, Lead Free="Lead Free", Length=4.9mm, Max Supply Voltage=18V, Min Supply Voltage=4.5V, Mount="Surface Mount", Number of Channels=1, Number of Elements=3, Number of Pins=8, Number of Terminals=8, Packaging=Rail/Tube, Quiescent Current=5.2mA, Radiation Hardening=No, REACH SVHC="No SVHC", RoHS=Yes, Slew Rate=15V/µs, Voltage=18V, Weight=0.002677oz, Width=3.91mm
U3: library part CMP-IC-00091-1, "SoundPlus™ high common-mode rejection (91-dB), low THD+N (-120-dB) dual differential line receiver", Case/Package=TSSOP, Mount=SMD, Pins=14, RoHS=Yes
U4: library part CMP-0312-00068-2, "96 kHz Digital Audio Receiver, 50 ps Jitter, 3.3V, -40 to 85 degC, 28-Pin TSSOP (PW), Green (RoHS & no Sb/Br)", Manufacturer="Texas Instruments", Supply Voltage(s)(V)=3.3, Code_JEDEC=MO-153, ComponentLink1Description=Datasheet, ComponentLink1URL=http://www.ti.com/general/docs/lit/getliterature.tsp?genericPartNumber=DIR9001&fileType=pdf, ComponentLink2Description="Package Specification", ComponentLink2URL=http://www.ti.com/litv/pdf/mpds364, DatasheetVersion=SLES198, Eco-Plan="Green (RoHS & no Sb/Br)", Jitter(ps)=50, Mounting Technology="Surface Mount", PackageDescription="28-Pin Plastic Thin Small Outline Package 9.7 x 4.4 mm Body ,0.65 mm Pitch", PackageReference=PW0028A, PackageVersion="revG, Feb-2011", PartNumber=DIR9001PW, Sampling Rate(Max)(kHz)=108, SubFamily="Digital Audio Receiver"
U5: library part CMP-0535-00061-1, Manufacturer="Analog Devices", Supply Voltage=5, Temperature range="-40 to 85 degC", ComponentLink1Description="Manufacturer URL", ComponentLink2Description=Datasheet, ComponentLink3Description="Package Specification", DatasheetVersion="Rev. E", Duplex=Half, Guaranteed Data Rate="30 Mbps", Mounting Technology="Surface Mount", Number of Drivers=1, PackageDescription="8-Pin Standard Small Outline Package, Body 4.9 x 3.9 mm, Pitch 1.27 mm", PackageVersion=06/2006, Packing=Tube, PartNumber=ADM1485ARZ, Receiver Hysteresis="50 mV", RoHS=TRUE
U6 U8 U9: library part CMP-IC-00203-1, "LM317EMP SOT223", Zenitel PartNumber=4000084254, Mount=SMD
U7: library part CMP-0062-01833-3, "3-Terminal Adjustable Negative Regulator, 4-pin SOT-223", Manufacturer="Texas Instruments", PackageTopMarking=XYTT*N02A, PowerWise=N, Code_IPC=SOT223-4, Code_JEDEC=TO-261-AA, ComponentLink1Description="Datasheet URL", ComponentLink1URL=http://www.ti.com/general/docs/lit/getliterature.tsp?genericPartNumber=LM337-N&fileType=pdf, CompType="LDO IC", PackageDescription="Molded SOT-223, 6.50 x 3.56 x 1.6mm Body, 4 Lead, 2.3mm Pitch", PackageReference=DCY0004A, PinCount=4, RoHS=N
U10: library part CMP-IC-00078-4, "2-Channel Audio Limiter", Case/Package=MSOP10, Mount=SMD, Pins=10, RoHS=Yes
Y1: library part CMP-XTAL-00115-1, "Crystal 24.576MHZ 18pF 5X3.2mm", Frequency=24,576MHz, Zenitel PartNumber=4000086516, Mount=HOLE, Type=Crystal

## Free pads (board coordinates)
  round 7 / inner round 3.4 / far side round 7 hole 3.3: 2(23,3.5) 2(23,96.5) 2(70.731,3.5) 2(96.5,96.5)

## Via types
v1: diameter 0.6, hole 0.3, Top Layer to Bottom Layer, tented both sides, 613 vias
v2: diameter 1, hole 0.5, Top Layer to Bottom Layer, tented both sides, 38 vias

## Nets (pads, with @x,y where several pads share a name; then routed paths per layer and width w, separated by ;. In a path a pad name is that pad's centre, name@x,y a point inside that pad or via, vN(x,y) a via of type N, cw(c..) or ccw(c..) an arc to the next point about the centre after c; other vN are vias at no path point)
3v3: C14.2 C15.2 C16.1 C17.1 C31.2 R20.1 R22.1 R24.1 R26.1 R32.2 TP22.1 U4.5 U4.24 U8.2 U8.4 | length 121.2
  Top Layer w0.3: TP22.1@38.85,53.25 38.85,53.11 39.7,52.26 39.7,51.76 C31.2@40.1,51.36 ; R32.2@41.3,53.25 42.1,52.45
  Top Layer w0.45: C15.2@71.507,71.433 71.932,71.858 71.932,72.702 72.386,73.155 72.391,73.155 72.471,73.235 C16.1@72.471,73.24 ; C14.2@72.231,84.19 72.249,84.172 72.249,83.34 72.449,83.141 72.449,82.785 72.544,82.69 72.564,82.69 72.579,82.675 U4.24@72.579,81.03 ; C16.1@72.451,73.24 72.511,73.3 72.511,73.64 72.579,73.708 U4.5@72.579,75.13
  Top Layer w0.5: C15.2@71.507,71.433 71.73,71.433 71.897,71.265 71.897,70.575 72.185,70.287 v2(72.185,70.152) ; C14.2@72.231,84.19 v2(72.231,85.761)
  Top Layer w1: U8.4@49.6,52.45 U8.2@43.8,52.45 42.1,52.45 41.89,52.45 40.8,51.36 C31.2@40.1,51.36 37.7,51.36 36.8,52.26 36.8,54.44 43.46,61.1 v2(50.65,61.1) ; v2(53.6,61.1) 53.6,73.715 61.761,81.877 ; v2(65.796,69.316) 65.8,69.32 65.8,77.838 61.761,81.877 ; v2(68.037,67.125) 68.225,67.125 71.252,70.152 71.897,70.152 v2(72.185,70.152) ; v2(72.231,85.761) 72.231,86.971 71.308,87.894 67.778,87.894 61.761,81.877
  Bottom Layer w0.3: R22.1@71.068,84.015 71.077,84.007 71.965,84.007 71.974,83.998 71.974,85.355 72.231,85.612 v2(72.231,85.761) ; v2(72.185,70.152) 74.04,72.006 77.802,72.006 77.807,72.011 78.649,72.011 R26.1@78.654,72.015
  Bottom Layer w1: v2(50.65,61.1) v2(53.6,61.1) ; v2(65.796,69.316) 67.986,67.125 v2(68.037,67.125)
5v: C1.2 C20.2 C33.2 C34.1 R34.2 TP23.1 U1.1 U5.8 U9.2 U9.4 U10.1 | length 137.7
  Top Layer w0.3: TP23.1@38.75,66.85 38.75,66.8 39.6,65.95 39.6,65.55 C33.2@40.1,65.05 ; C34.1@46.1,27.068 47.413,27.068 47.571,26.91 U10.1@49.4,26.91
  Top Layer w0.5: R34.2@41.325,66.825 41.325,66.111 41.536,65.9
  Top Layer w1: U1.1@30.22,66.75 30.409,66.939 32.357,66.939 32.368,66.95 C1.2@32.818,66.95 ; C1.2@32.593,66.95 35.144,66.95 ; v2(45.862,30.24) 46.098,30.004 46.098,27.588 46.1,27.586 C34.1@46.1,27.068 ; v2(45.875,32.14) 39.365,32.14 33.268,38.237 33.268,61.774 36.544,65.05 ; U9.4@49.6,65.9 U9.2@43.8,65.9 41.536,65.9 41.536,65.786 40.8,65.05 C33.2@40.1,65.05 39.6,65.05 36.544,65.05 ; v2(52.5,82.19) 45.83,82.19 43.304,79.664 43.304,75.11 35.358,67.164 34.894,66.7 36.544,65.05 ; v2(56.3,82.19) 56.3,91 64.2,98.9 70.062,98.9 70.648,98.314 70.648,97.82 70.65,97.818 C20.2@70.65,97.3 71.454,97.3 72.127,96.627 U5.8@72.127,95.155
  Bottom Layer w1: v2(45.862,30.24) 45.862,32.127 v2(45.875,32.14) ; v2(52.5,82.19) v2(56.3,82.19)
ADC_0: TP19.1 U1.5 | length 3.1
  Top Layer w0.3: TP19.1@27.1,56.59 U1.5@30.22,56.59
ADC_2: TP16.1 U1.7 | length 3.1
  Top Layer w0.3: TP16.1@27.1,51.51 U1.7@30.22,51.51
ADC_3: TP18.1 U1.6 | length 3.1
  Top Layer w0.3: TP18.1@27.1,54.05 U1.6@30.22,54.05
AES_N: C18.2 L1.4 R17.2 TR1.2 | length 102.8
  Top Layer w0.3: v1(74.814,22.1) 91.3,22.1 95.7,26.5 95.7,38.827 97.714,40.841 97.714,61.796 96.71,62.8 96.71,64.5 97.56,65.35 97.56,73.835 92.715,78.68 C18.2@89.355,78.68
  Top Layer w0.5: C18.2@89.355,78.68 L1.4@87.855,78.68 87.855,82.915 93,88.06 93,92.7 92.4,93.3 TR1.2@90.96,93.3
  Bottom Layer w0.3: v1(74.814,22.1) 74.819,22.095 R17.2@74.819,21.1
AES_P: C19.2 L1.3 R16.2 TR1.1 | length 106
  Top Layer w0.3: v1(71.581,22.1) 72.314,22.834 90.934,22.834 95.11,27.01 95.11,39.05 97.083,41.023 97.083,61.4 95.994,62.489 95.994,64.734 96.831,65.571 96.831,73.404 92.435,77.8 v1(90.705,77.8) ; v1(84.3,77.8) 84.357,77.858 84.357,78.438 84.6,78.68 C19.2@85.365,78.68
  Top Layer w0.5: C19.2@85.365,78.68 L1.3@86.855,78.68 86.855,83.955 90.96,88.06 TR1.1@90.96,90.76
  Bottom Layer w0.3: R16.2@71.581,21.1 v1(71.581,22.1) ; v1(84.3,77.8) v1(90.705,77.8)
BCLK_in: U1.21 U4.11 | length 40.4
  Top Layer w0.3: U1.21@60.7,55.32 59.43,56.59 59.43,61.1 59.93,61.6 76.919,61.6 80.135,64.816 80.135,68.465 76.982,71.618 76.982,73.057 76.479,73.56 U4.11@76.479,75.13